# Altium PCB MainBoard1.PcbDoc
Units mil, origin at the board's own origin, x right, y up, seen from the top; angles counter-clockwise.
Board outline 6299.21 x 9187 mil, 4 copper layers (Component Side, Ground Plane, Power Plane, Solder Side), stack 33.234 mil thick; 71 components, 164 nets, 725 pads, 58 vias.
Unrouted connection lines stored in the file: 209.
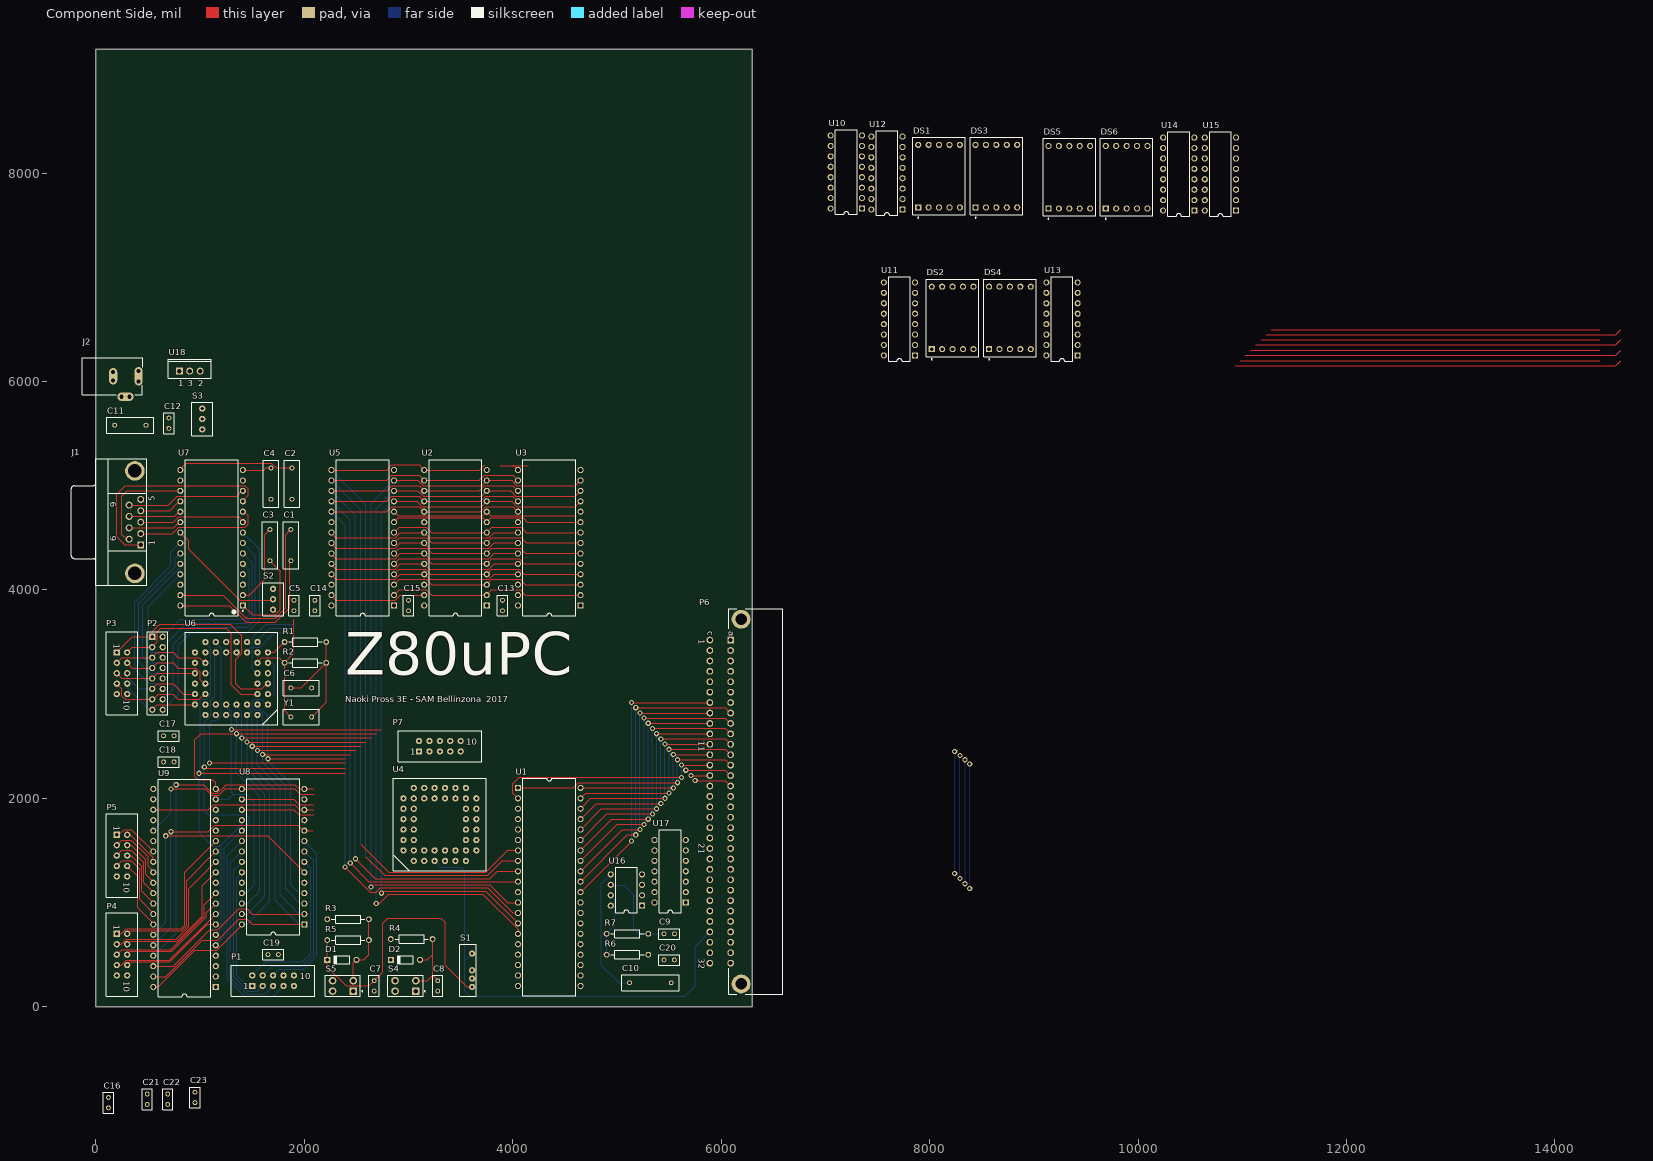
[diagram p0: Component Side view]
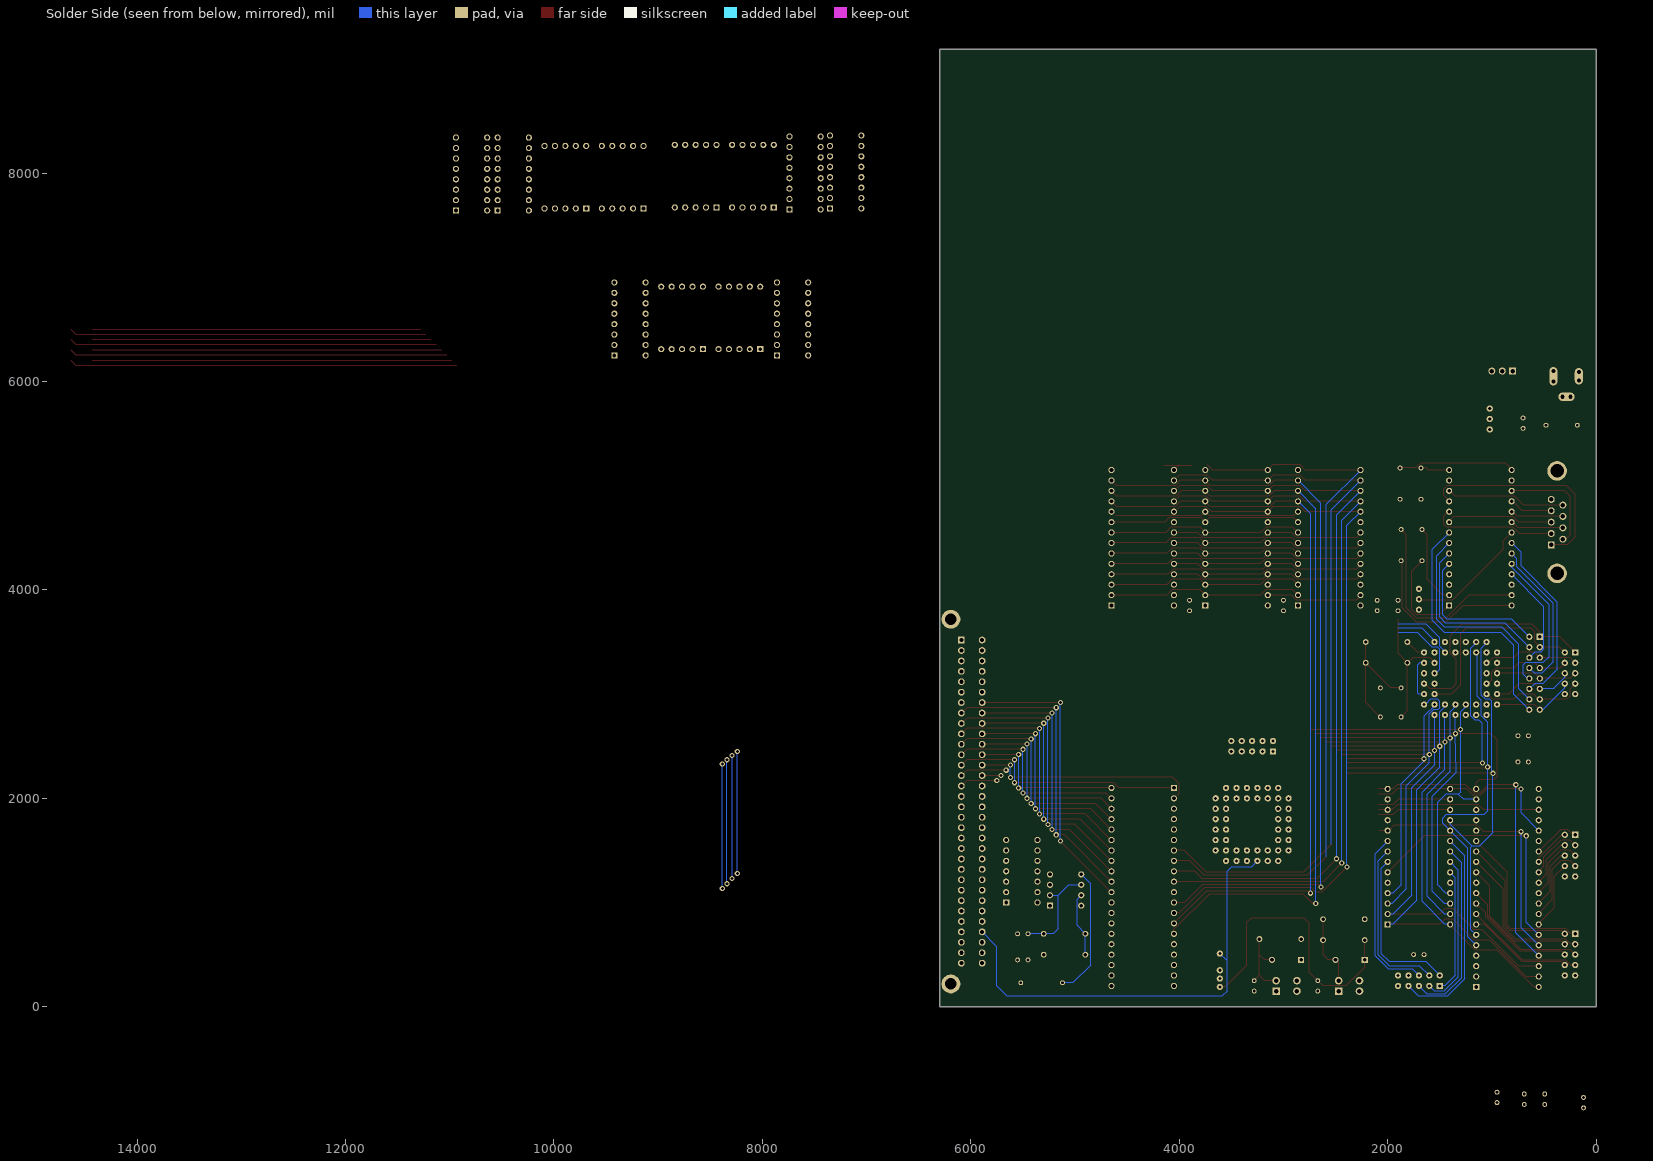
[diagram p1: Solder Side view, seen from below]
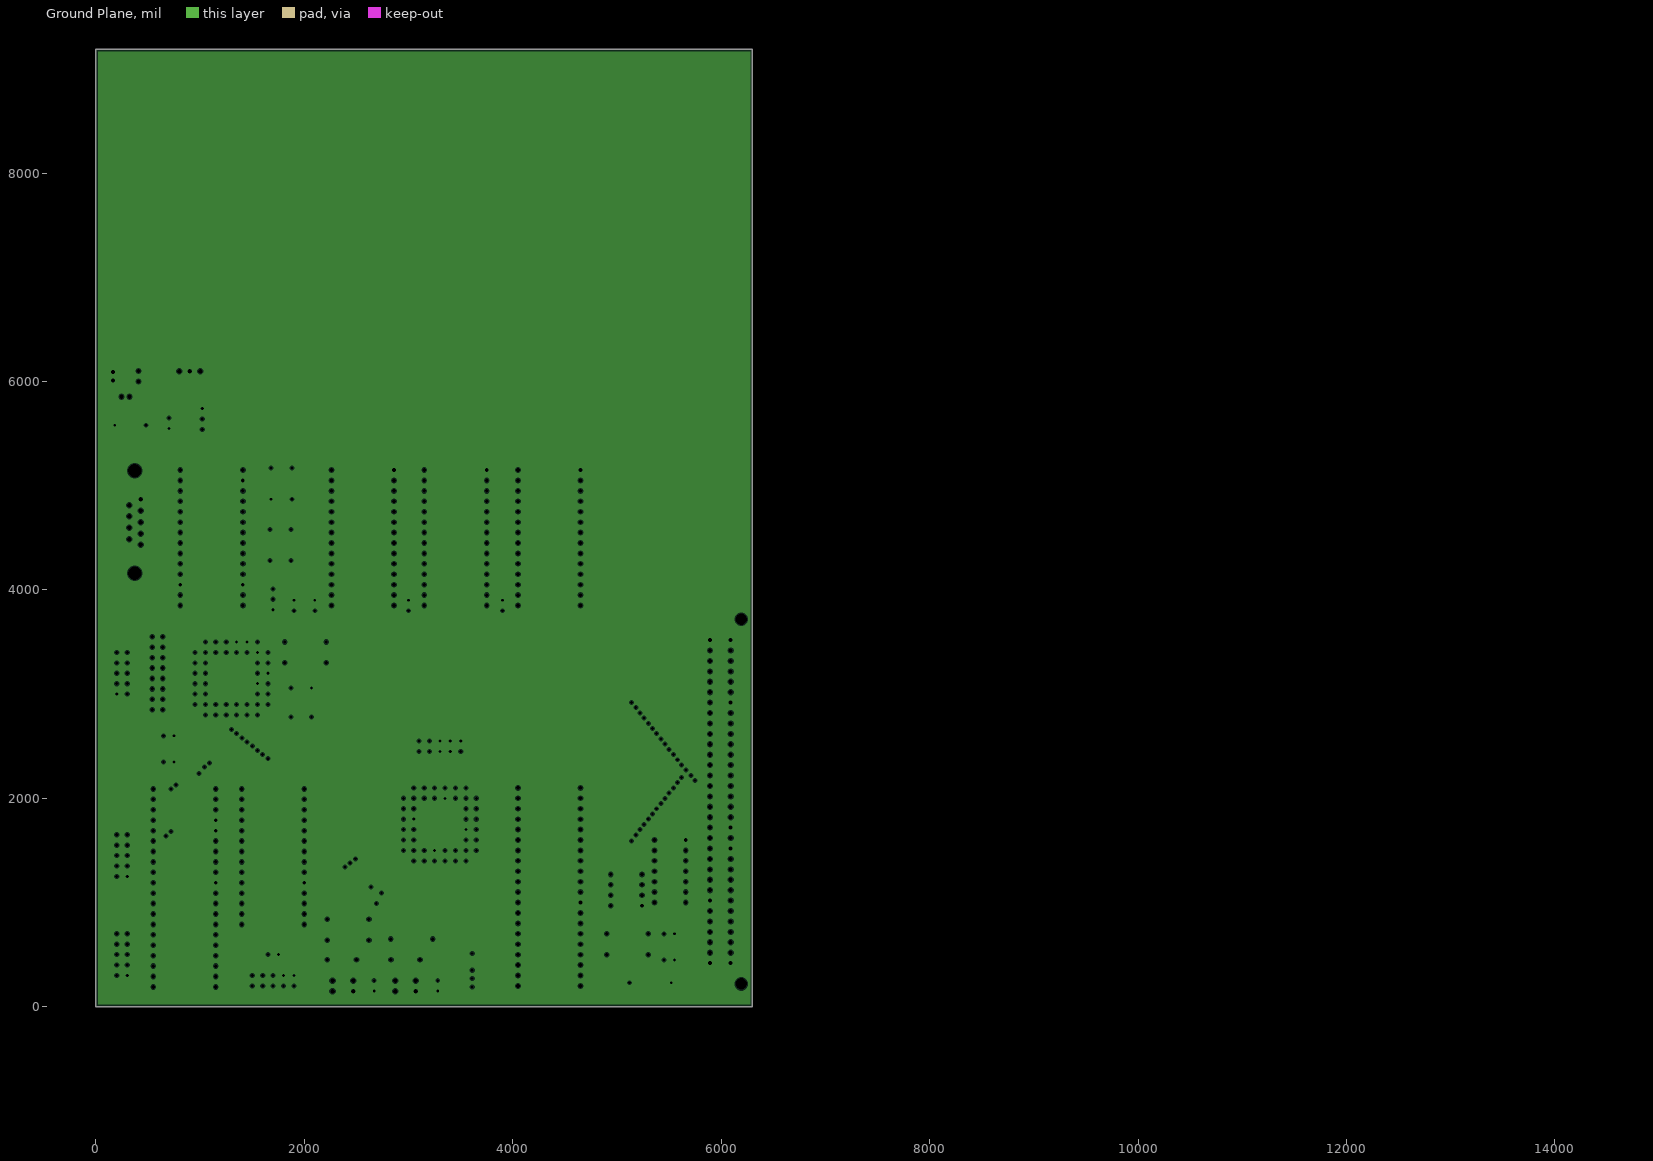
[diagram p2: Ground Plane, clearances drawn from the general rule]
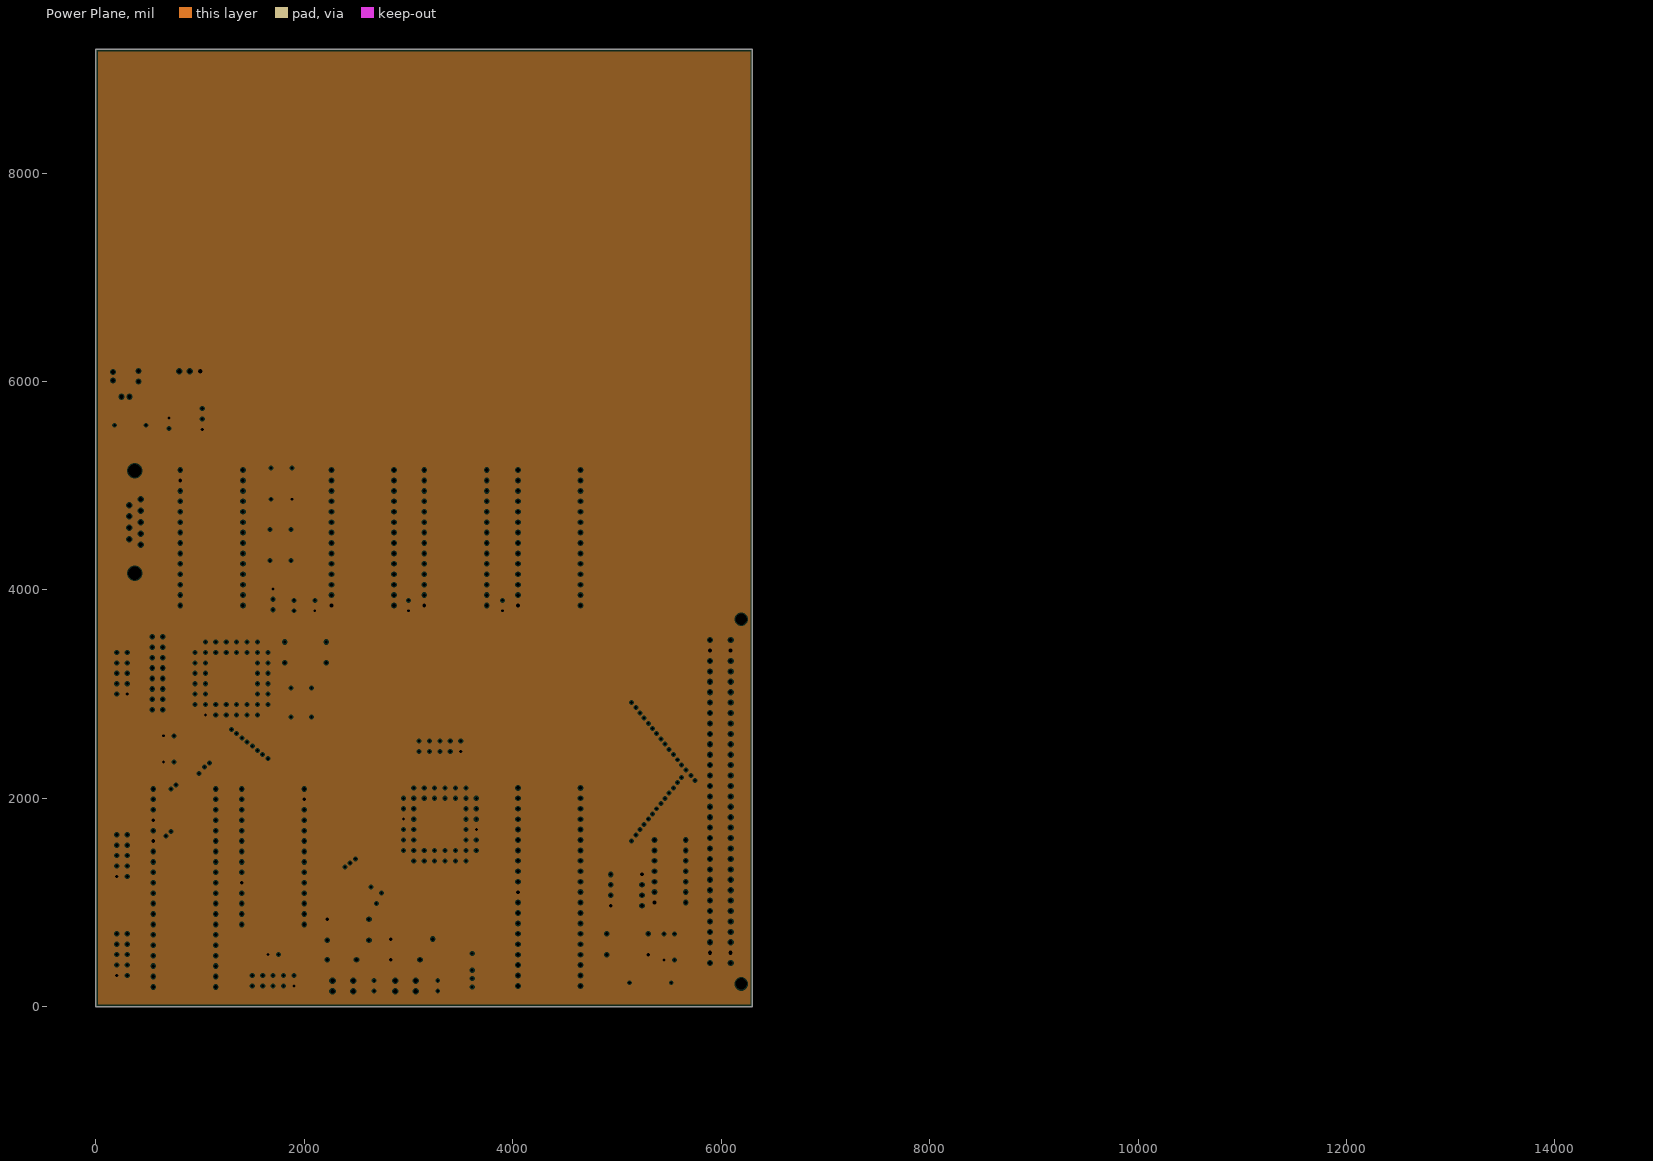
[diagram p3: Power Plane, clearances drawn from the general rule]

## Layer stack, top to bottom
Top Solder: solder mask 0.4, Solder Resist, Dk 3.5
Component Side: signal copper 1.4
Dielectric 1: core 12.6, FR-4, Dk 4.8
Ground Plane: plane copper 1.4169, net DB9-5
Dielectric 3: prepreg 5, Dk 4.2
Power Plane: plane copper 1.4169, net VCC
Dielectric 4: core 10, Dk 4.2
Solder Side: signal copper 1.4
Bottom Solder: solder mask 0.4, Solder Resist, Dk 3.5

## Board outline
0,0 0,9187 6299.21,9187 6299.21,0

## Design rules (kind name [scope] priority, off if disabled: settings)
BoardOutlineClearance [All] p1: gap=9.84 except(0: Arc-SplitContinuation Track-SplitContinuation SMDPad-SplitContinuation THPad-SplitContinuation Via-SplitContinuation Fill-SplitContinuation Poly-SplitContinuation Region-SplitContinuation Text-SplitContinuation)
Clearance Clearance-xPP-xTP-xTT [All] p1: gap=5.91
ComponentClearance [All] p1: gap=9.84 collisioncheckmode=3 verticalgap=9.84 showdistances=FALSE
DiffPairsRouting [All] p1: maxlimit=9.84 minlimit=9.84 mostfreqgap=9.84 toplayer_minwidth=15 toplayer_maxwidth=15 toplayer_prefwidth=15 bottomlayer_minwidth=15 bottomlayer_maxwidth=15 bottomlayer_prefwidth=15 maxuncoupledlength=492.13
Height [All] p1: minheight=0 maxheight=984.25 prefheight=492.13
HoleSize HoleSize-PTH [All] p1: absolutevalues=TRUE maxlimit=78.74 minlimit=9.84 maxpercent=80.000 minpercent=20.000
HoleToHoleClearance [All] p1: gap=13.78 allowstackedmicrovias=TRUE
MinimumAnnularRing "Minimum IAR  >0.45mm" [((ObjectKind = 'Pad') OR (ObjectKind = 'Via')) And (Layer = 'MultiLayer') And (HoleDiameter > AsMM(0.45))] p1: minimumring=6.89 // minimum inner annular ring for pads > 0.45mm finished hole size
MinimumAnnularRing "Minimum IAR <=0.45mm" [((ObjectKind = 'Pad') OR (ObjectKind = 'Via')) And (Layer = 'MultiLayer') And (HoleDiameter <= AsMM(0.45))] p2: minimumring=6.89 // minimum inner annular ring for pads <= 0.45mm finished hole size
MinimumSolderMaskSliver [All] p1: minsoldermaskwidth=3.15
PlaneClearance PlaneClearance-IPI [All] p1: clearance=9.84
PlaneConnect [All] p1: planeconnectstyle=Relief reliefexpansion=6.89 reliefentries=4 reliefconductorwidth=7.87 reliefairgap=7.87
PolygonConnect PolygonConnect-xTW [All] p1: connectstyle=Relief reliefconductorwidth=7.87 reliefentries=4 polygonreliefangle="90 Angle" airgapwidth=7.87
RoutingCorners [All] p1: cornerstyle=45-Degree minsetback=98.43 maxsetback=98.43
RoutingVias "RoutingVias > 0.45mm" [(ObjectKind = 'Via') And (HoleDiameter > AsMM(0.45))] p1: holewidth=19.68 width=33.46 viastyle="Through Hole" minholewidth=19.68 minwidth=33.46 maxholewidth=35.43 maxwidth=49.21 // finishet hole size > 0.45mm
RoutingVias "RoutingVias <= 0.45mm" [(ObjectKind = 'Via') And (HoleDiameter <= AsMM(0.45))] p2: holewidth=11.81 width=25.59 viastyle="Through Hole" minholewidth=9.84 minwidth=23.62 maxholewidth=17.72 maxwidth=31.5 // finishet hole size <= 0.45mm
SilkToSilkClearance [All] p1: silktosilkclearance=7.87
SilkToSolderMaskClearance SilkscreenOverComponentPads [IsPad] p1: minsilkscreentomaskgap=7.87 clearancetoexposedcopper=TRUE
SolderMaskExpansion [All] p1: expansion=0
Width Width-xTW [All] p1: maxlimit=60 minlimit=6 preferedwidth=10
19 further rules are at their usual default settings.

## Classes and differential pairs
component class BusViewer: DS1 DS2 DS3 DS4 DS5 DS6 S3 U10 U11 U12 U13 U14 U15
component class IODevices: C1 C2 C3 C4 C5 C6 J1 P1 P2 P3 P4 P5 R1 R2 S2 U6 U7 U8 U9 Y1
component class MainSheet: S1 U1 U2 U3 U4 U5
component class Peripherals: C7 C8 C9 C10 C11 C12 C13 C14 C15 C16 C17 C18 C19 C20 C21 C22 C23 D1 D2 J2 P6 P7 R3 R4 R5 R6 R7 S4 S5 U16 U18

## Components (designator, comment, footprint, x,y, rotation, side; value= is the part's Value field where it differs from the comment)
C1 "Cap" RAD-0.3 1870,4430 r90 top
C2 "Cap" RAD-0.3 1880,5020 r270 top
C3 "Cap" RAD-0.3 1670,4430 r270 top
C4 "Cap" RAD-0.3 1680,5020 r270 top
C5 "Cap" RAD-0.1 1900,3850 r90 top
C6 "Cap" RAD-0.2 1970,3060 r0 top
C7 "Cap" RAD-0.1 2670,200 r90 top
C8 "Cap" RAD-0.1 3280,200 r90 top
C9 "Cap" RAD-0.1 5500,700 r180 top
C10 "Cap" RAD-0.4 5320,230 r180 top
C11 "Cap" RAD-0.3 330,5580 r0 top
C12 "Cap" RAD-0.1 700,5600 r90 top
C13 "Cap" RAD-0.1 3900,3850 r270 top
C14 "Cap" RAD-0.1 2100,3850 r270 top
C15 "Cap" RAD-0.1 3000,3850 r270 top
C16 "Cap" RAD-0.1 120,-920 r270 top
C17 "Cap" RAD-0.1 700,2600 r180 top
C18 "Cap" RAD-0.1 700,2350 r180 top
C19 "Cap" RAD-0.1 1700,500 r180 top
C20 "Cap" RAD-0.1 5500,450 r180 top
C21 "Cap" RAD-0.1 492.13,-887.4 r90 top
C22 "Cap" RAD-0.1 688.98,-887.4 r90 top
C23 "Cap" RAD-0.1 950,-870 r90 top
D1 "1N4148" DO-35 2360,450 r180 top
D2 "1N4148" DO-35 2970,450 r180 top
DS1 "Dpy Blue-CC" H 8090,7970 r0 top
DS2 "Dpy Blue-CC" H 8220,6610 r0 top
DS3 "Dpy Blue-CC" H 8640,7970 r0 top
DS4 "Dpy Blue-CC" H 8770,6610 r0 top
DS5 "Dpy Blue-CC" H 9340,7960 r0 top
DS6 "Dpy Blue-CC" H 9890,7960 r0 top
J1 "D Connector 9" DSUB1.385-2H9 0,4650 r90 top
J2 "PWR2.5" KLD-0202 -130,6050 r0 top
P1 "MHDR1X10" HDR5x2_SOCK 1500,200 r0 top
P2 "Header 8X2" HDR2X8 540,3550 r270 top
P3 "Header 10" HDR5x2_SOCK 200,3400 r270 top
P4 "MHDR1X10" HDR5x2_SOCK 200,700 r270 top
P5 "MHDR1X10" HDR5x2_SOCK 200,1650 r270 top
P6 "Header 32X2" 0973264X804 6299.21,1968.5 r270 top locked
P7 "MHDR1X10" HDR5x2_SOCK 3100,2450 r0 top
R1 "Res2" AXIAL-0.4 2010,3500 r180 top
R2 "Res2" AXIAL-0.4 2010,3300 r180 top
R3 "Res2" AXIAL-0.4 2420,840 r180 top
R4 "Res2" AXIAL-0.4 3030,650 r180 top
R5 "Res2" AXIAL-0.4 2420,640 r180 top
R6 "Res2" AXIAL-0.4 5100,500 r0 top
R7 "Res2" AXIAL-0.4 5100,700 r180 top
S1 "SW-3WAY" SW_3WAY 3570,350 r270 top
S2 "SW-SPDT" SW_2WAY 1700,3910 r90 top
S3 "SW-SPDT" SW_2WAY 1020,5640 r270 top
S4 "SW-PB" DPST-4 2970,200 r180 top
S5 "SW-PB" DPST-4 2370,200 r180 top
U1 "Z84C0004PEC" PDIP40 4350,1150 r270 top
U2 "M28C64-150P1" PDIP28 3450,4500 r90 top
U3 "HM62256" PDIP28 4350,4500 r90 top
U4 "M4-32/32-15JC" PLCC44_SOCKET 3300,1750 r90 top
U5 "M28C64-150P1" PDIP28 2560,4500 r90 top
U6 "TL16C550C" PLCC44_SOCKET 1300,3150 r180 top
U7 "MAX214" DIP28W 1110,4500 r180 top
U8 "Z84C3004PEC" PDIP28 1700,1440 r90 top
U9 "Z84C2004PEC" PDIP40 850,1140 r90 top
U10 "MC14495" DIP16 7200,8010 r90 top
U11 "MC14495" DIP16 7710,6600 r90 top
U12 "MC14495" DIP16 7590,8000 r90 top
U13 "MC14495" DIP16 9270,6600 r90 top
U14 "MC14495" DIP16 10390,7990 r90 top
U15 "MC14495" DIP16 10790,7990 r90 top
U16 "SE555P" P008 5090,1120 r90 top
U17 "SG51P" DIP14 5510,1300 r90 top
U18 "L7805ACV" TO220ABN 900,6100 r0 top
Y1 "XTAL" RAD-0.2 1970,2780 r0 top

## Footprints (in the part's own frame and the unit in brackets; to place one, negate y for a bottom-side part, rotate by r counter-clockwise, add the part's x,y. Pads: shape width x height; smd on the part's side, far side on the other; paste and mask are expansions set on the pad)
0973264X804 [mm] "Connector; DIN 41612, Type R, Thru-Hole; Rows a+c, 64 Position; Right Angle"
  round 4.6 hole 2.8: 33(-44.45,-2.76) 34(44.45,-2.76)
  rect 1.65x1.65 hole 1: A1(-39.37,-5.3)
  round 1.65 hole 1: A2(-36.83,-5.3) A3(-34.29,-5.3) A4(-31.75,-5.3) A5(-29.21,-5.3) A6(-26.67,-5.3) A7(-24.13,-5.3) A8(-21.59,-5.3) A9(-19.05,-5.3) A10(-16.51,-5.3) A11(-13.97,-5.3) A12(-11.43,-5.3) A13(-8.89,-5.3) A14(-6.35,-5.3) A15(-3.81,-5.3) A16(-1.27,-5.3) A17(1.27,-5.3) A18(3.81,-5.3) A19(6.35,-5.3) A20(8.89,-5.3) A21(11.43,-5.3) A22(13.97,-5.3) A23(16.51,-5.3) A24(19.05,-5.3) A25(21.59,-5.3) A26(24.13,-5.3) A27(26.67,-5.3) A28(29.21,-5.3) A29(31.75,-5.3) A30(34.29,-5.3) A31(36.83,-5.3) A32(39.37,-5.3) C1(-39.37,-10.38) C2(-36.83,-10.38) C3(-34.29,-10.38) C4(-31.75,-10.38) C5(-29.21,-10.38) C6(-26.67,-10.38) C7(-24.13,-10.38) C8(-21.59,-10.38) C9(-19.05,-10.38) C10(-16.51,-10.38) C11(-13.97,-10.38) C12(-11.43,-10.38) C13(-8.89,-10.38) C14(-6.35,-10.38) C15(-3.81,-10.38) C16(-1.27,-10.38) C17(1.27,-10.38) C18(3.81,-10.38) C19(6.35,-10.38) C20(8.89,-10.38) C21(11.43,-10.38) C22(13.97,-10.38) C23(16.51,-10.38) C24(19.05,-10.38) C25(21.59,-10.38) C26(24.13,-10.38) C27(26.67,-10.38) C28(29.21,-10.38) C29(31.75,-10.38) C30(34.29,-10.38) C31(36.83,-10.38) C32(39.37,-10.38)
  silkscreen extent -47,-5.8 47,7.34
AXIAL-0.4 [mm] "Axial Device, Thru-Hole; 2 Leads; 0.4 in Pin Spacing"
  round 1.4 hole 0.85: 1(-5.08,0) 2(5.08,0)
  silkscreen extent -4.06,-1.02 4.06,1.02
DIP14 [mm] "DIP; 14 Leads; Row Spacing 7.62 mm; Pitch 2.54 mm"
  rect 1.5x1.5 hole 0.9: 1(-7.62,-3.81)
  round 1.5 hole 0.9: 2(-5.08,-3.81) 3(-2.54,-3.81) 4(0,-3.81) 5(2.54,-3.81) 6(5.08,-3.81) 7(7.62,-3.81) 8(7.62,3.81) 9(5.08,3.81) 10(2.54,3.81) 11(0,3.81) 12(-2.54,3.81) 13(-5.08,3.81) 14(-7.62,3.81)
  silkscreen extent -10.1,-2.65 10.1,2.65
DIP16 [mm] "DIP; 16 Leads; Row Spacing 7.62 mm; Pitch 2.54 mm"
  rect 1.5x1.5 hole 0.9: 1(-8.89,-3.81)
  round 1.5 hole 0.9: 2(-6.35,-3.81) 3(-3.81,-3.81) 4(-1.27,-3.81) 5(1.27,-3.81) 6(3.81,-3.81) 7(6.35,-3.81) 8(8.89,-3.81) 9(8.89,3.81) 10(6.35,3.81) 11(3.81,3.81) 12(1.27,3.81) 13(-1.27,3.81) 14(-3.81,3.81) 15(-6.35,3.81) 16(-8.89,3.81)
  silkscreen extent -10.3,-2.65 10.3,2.65
DIP28W [mm] "DIP, 28-Leads, Row Spacing 15.24mm, Pitch 2.54mm, Body 37.02x13.72mm"
  rect 1.5x1.5 hole 0.9: 1(-7.62,16.51)
  round 1.5 hole 0.9: 2(-7.62,13.97) 3(-7.62,11.43) 4(-7.62,8.89) 5(-7.62,6.35) 6(-7.62,3.81) 7(-7.62,1.27) 8(-7.62,-1.27) 9(-7.62,-3.81) 10(-7.62,-6.35) 11(-7.62,-8.89) 12(-7.62,-11.43) 13(-7.62,-13.97) 14(-7.62,-16.51) 15(7.62,-16.51) 16(7.62,-13.97) 17(7.62,-11.43) 18(7.62,-8.89) 19(7.62,-6.35) 20(7.62,-3.81) 21(7.62,-1.27) 22(7.62,1.27) 23(7.62,3.81) 24(7.62,6.35) 25(7.62,8.89) 26(7.62,11.43) 27(7.62,13.97) 28(7.62,16.51)
  silkscreen extent -7.75,-19.05 6.45,19.05, body extent -6.68,-19.05 6.68,19.05, height 4.92
DO-35 [mm] "Diode, Axial; Body 3.8 x 1.9 mm (LxDia. max), Lead Dia. 0.53 mm (max)"
  round 1.5 hole 0.9: 1(-3.55,0)
  rect 1.5x1.5 hole 0.9: 2(3.55,0)
  silkscreen extent -1.95,-0.95 2.05,0.95
DPST-4 [mm] "Switch; 4 Leads"
  rect 1.85x1.85 hole 1.1: 1(-2.54,1.27)
  round 1.85 hole 1.1: 2(-2.54,-1.27) 3(2.54,-1.27) 4(2.54,1.27)
  silkscreen extent -4.88,-2.54 4.28,2.54
DSUB1.385-2H9 [mm] "Connector; D Subminiature; 9 Position; Right Angle; Pitch 1.385 mm"
  rect 1.69x1.69 hole 1.09: 1(-5.54,-10.92)
  round 1.69 hole 1.09: 2(-2.77,-10.92) 3(0,-10.92) 4(2.77,-10.92) 5(5.54,-10.92) 6(-4.155,-8.08) 7(-1.385,-8.08) 8(1.385,-8.08) 9(4.155,-8.08)
  round 4.76 hole 3.26: 10(-12.495,-9.5) 11(12.495,-9.5)
  silkscreen extent -15.4,-12.4 15.4,6
H [mm] "LED, 7-Segment Display, 14.2 mm, RHD; 10 Leads; Row Space 15.24 mm; Pitch 2.54 mm"
  rect 1.5x1.5 hole 0.9: 1(-5.08,-7.62)
  round 1.5 hole 0.9: 2(-2.54,-7.62) 3(0,-7.62) 4(2.54,-7.62) 5(5.08,-7.62) 6(5.08,7.62) 7(2.54,7.62) 8(0,7.62) 9(-2.54,7.62) 10(-5.08,7.62)
  silkscreen extent -6.4,-10.22 6.4,9.45, body extent -6.4,-9.45 6.4,9.45, height 8.25
HDR2X8 [mm] "Connector; Header; 8x2 Position"
  rect 1.5x1.5 hole 0.9: 1(0,0)
  round 1.5 hole 0.9: 2(0,2.54) 3(2.54,0) 4(2.54,2.54) 5(5.08,0) 6(5.08,2.54) 7(7.62,0) 8(7.62,2.54) 9(10.16,0) 10(10.16,2.54) 11(12.7,0) 12(12.7,2.54) 13(15.24,0) 14(15.24,2.54) 15(17.78,0) 16(17.78,2.54)
  silkscreen extent -1.27,-1.27 19.05,3.81
HDR5x2_SOCK [mil]
  rect 60x60 hole 30: 1(0,0)
  round 60 hole 30: 2(0,100) 3(100,0) 4(100,100) 5(200,0) 6(200,100) 7(300,0) 8(300,100) 9(400,0) 10(400,100)
  silkscreen extent -200,-100 600,200
KLD-0202 [mm] "DC Power Jack, 2.5mm, KLD Series, PCB Mount"
  oval 2x4.5 all layers, no hole: 1(13.7,0)
  round 1.5 hole 1: 1A(13.7,-1.25) 1B(13.7,1.25) 2A(7.5,-1) 2B(7.5,1) 3A(9.5,-5) 3B(11.5,-5)
  oval 2x4 all layers, no hole: 2(7.5,0)
  oval 4x2 all layers, no hole: 3(10.5,-5)
  silkscreen extent 0,-4.5 14.6,4.5
P008 [mm] "DIP; 8 Leads; Row Spacing 7.62 mm; Pitch 2.54 mm"
  rect 1.5x1.5 hole 0.9: 1(-3.81,-3.81)
  round 1.5 hole 0.9: 2(-1.27,-3.81) 3(1.27,-3.81) 4(3.81,-3.81) 5(3.81,3.81) 6(1.27,3.81) 7(-1.27,3.81) 8(-3.81,3.81)
  silkscreen extent -5.5,-2.65 5.5,2.65
PDIP28 [mm] "DIP; 28 Leads; Row Spacing 15.24 mm; Pitch 2.54 mm"
  rect 1.5x1.5 hole 0.9: 1(-16.51,-7.62)
  round 1.5 hole 0.9: 2(-13.97,-7.62) 3(-11.43,-7.62) 4(-8.89,-7.62) 5(-6.35,-7.62) 6(-3.81,-7.62) 7(-1.27,-7.62) 8(1.27,-7.62) 9(3.81,-7.62) 10(6.35,-7.62) 11(8.89,-7.62) 12(11.43,-7.62) 13(13.97,-7.62) 14(16.51,-7.62) 15(16.51,7.62) 16(13.97,7.62) 17(11.43,7.62) 18(8.89,7.62) 19(6.35,7.62) 20(3.81,7.62) 21(1.27,7.62) 22(-1.27,7.62) 23(-3.81,7.62) 24(-6.35,7.62) 25(-8.89,7.62) 26(-11.43,7.62) 27(-13.97,7.62) 28(-16.51,7.62)
  silkscreen extent -19.05,-6.45 19.05,6.45
PDIP40 [mm] "DIP; 40 Leads; Row Spacing 15.24 mm; Pitch 2.54 mm"
  rect 1.5x1.5 hole 0.9: 1(-24.13,-7.62)
  round 1.5 hole 0.9: 2(-21.59,-7.62) 3(-19.05,-7.62) 4(-16.51,-7.62) 5(-13.97,-7.62) 6(-11.43,-7.62) 7(-8.89,-7.62) 8(-6.35,-7.62) 9(-3.81,-7.62) 10(-1.27,-7.62) 11(1.27,-7.62) 12(3.81,-7.62) 13(6.35,-7.62) 14(8.89,-7.62) 15(11.43,-7.62) 16(13.97,-7.62) 17(16.51,-7.62) 18(19.05,-7.62) 19(21.59,-7.62) 20(24.13,-7.62) 21(24.13,7.62) 22(21.59,7.62) 23(19.05,7.62) 24(16.51,7.62) 25(13.97,7.62) 26(11.43,7.62) 27(8.89,7.62) 28(6.35,7.62) 29(3.81,7.62) 30(1.27,7.62) 31(-1.27,7.62) 32(-3.81,7.62) 33(-6.35,7.62) 34(-8.89,7.62) 35(-11.43,7.62) 36(-13.97,7.62) 37(-16.51,7.62) 38(-19.05,7.62) 39(-21.59,7.62) 40(-24.13,7.62)
  silkscreen extent -26.5,-6.45 26.5,6.45
PLCC44_SOCKET [mil] "Socket for PLCC44"
  round 60 hole 30: 1(50,250) 2(-50,350) 3(-50,250) 4(-150,350) 5(-150,250) 6(-250,350) 7(-350,250) 8(-250,250) 9(-350,150) 10(-250,150) 11(-350,50) 12(-250,50) 13(-350,-50) 14(-250,-50) 15(-350,-150) 16(-250,-150) 17(-350,-250) 18(-250,-350) 19(-250,-250) 20(-150,-350) 21(-150,-250) 22(-50,-350) 23(-50,-250) 24(50,-350) 25(50,-250) 26(150,-350) 27(150,-250) 28(250,-350) 29(350,-250) 30(250,-250) 31(350,-150) 32(250,-150) 33(350,-50) 34(250,-50) 35(350,50) 36(250,50) 37(350,150) 38(250,150) 39(350,250) 40(250,350) 41(250,250) 42(150,350) 43(150,250) 44(50,350)
  silkscreen extent -445,-445 445,445
RAD-0.1 [mm] "Radial Cap, Thru-Hole; 2 Leads; 0.1 in Pin Spacing"
  round 1.2 hole 0.7: 1(-1.27,0) 2(1.27,0)
  silkscreen extent -2.54,-1.27 2.54,1.27
RAD-0.2 [mm] "Radial Cap, Thru-Hole; 2 Leads; 0.2 in Pin Spacing"
  round 1.2 hole 0.7: 1(-2.54,0) 2(2.54,0)
  silkscreen extent -4.44,-1.91 4.44,1.91
RAD-0.3 [mm] "Radial Cap, Thru-Hole; 2 Leads; 0.3 in Pin Spacing"
  round 1.2 hole 0.7: 1(-3.81,0) 2(3.81,0)
  silkscreen extent -5.71,-1.91 5.71,1.91
RAD-0.4 [mm] "Radial Cap, Thru-Hole; 2 Leads; 0.4 in Pin Spacing"
  round 1.2 hole 0.7: 1(-5.08,0) 2(5.08,0)
  silkscreen extent -6.98,-1.91 6.98,1.91
SW_2WAY [mil]
  round 60 hole 30: 1(-100,0) 2(0,0) 3(100,0)
  silkscreen extent -160,-100 160,100
SW_3WAY [mil]
  round 60 hole 30: 1(-160,40) 3(0,40) 4(80,40) 5(160,40)
  silkscreen extent -250,-80 250,80
TO220ABN [mm] "TO, Thru-Hole, Vertical, Heatsink Mounted; 3 In-Line Leads; Pitch 2.54 mm; Pin sequence 1, 3, 2"
  rect 1.7x1.7 hole 1.1: 1(-2.54,0)
  round 1.7 hole 1.1: 2(2.54,0) 3(0,0)
  silkscreen extent -5.2,-1.7 5.2,2.9

## Part data
C1 C2 C3 C4 C5 C6 C7 C8 C9 C10 C11 C12 C13 C14 C15 C16 C17 C18 C19 C20 C21 C22 C23: "Capacitor"
D1 D2: library part "Diode 1N4148", "High Conductance Fast Diode"
DS1 DS2 DS3 DS4 DS5 DS6: "14.2 mm General Purpose Blue 7-Segment Display: CC, RH DP, Gray Surface"
J1: "Receptacle Assembly, 9 Position, Right Angle"
J2: "Low Voltage Power Supply Connector"
P1 P3 P4 P5 P7: "Header, 10-Pin"
P2: "Header, 8-Pin, Dual row"
P6: "Header, 32-Pin, Dual row"
R1 R2 R3 R4 R5 R6 R7: "Resistor"
S1: "SGA-13P-03V-7295"
S2 S3: "SPDT Subminiature Toggle Switch, Right Angle Mounting, Vertical Actuation"
S4 S5: "Switch"
U1: "CMOS 8-Bit Microprocessor"
U2 U5: "Parallel 64 Kbit (8K x 8) EEPROM with Software Data Protection"
U3: "8K x 8 Static RAM"
U4: "High-Performance EE CMOS In-System Programmable Logic"
U8: "CMOS Four-Channel Counter/Timer Circuit"
U9: "CMOS Parallel I/O Controller"
U10 U11 U12 U13 U14 U15: "Hexadecimal to seven segment Latch / Decoder LED Driver"
U16: "Precision Timer"
U17: "4.000000  MHz High Frequency Oscillator"
U18: "Precision 1A Regulator"
Y1: "Crystal Oscillator"

## Via types
v1: diameter 50, hole 28, Component Side to Solder Side, 58 vias

## Nets (pads, with @x,y where several pads share a name; then routed paths per layer and width w, separated by ;. In a path a pad name is that pad's centre, name@x,y a point inside that pad or via, vN(x,y) a via of type N, cw(c..) or ccw(c..) an arc to the next point about the centre after c; other vN are vias at no path point)
A0: P6.C7 U1.30 U2.10 U3.10 U4.9 U5.10 U6.28 U8.18 U9.6 U10.5 | length 9360.3
  Component Side w10: v1(990,2240) 2390,2240 ; U5.10 2900.43,4709.57 3709.57,4709.57 U2.10 3790.43,4709.57 4609.57,4709.57 ; U1.30 v1(5140,1590) ; v1@5140,2918.5 P6.C7
  Solder Side w10: U6.28@1040,3500 1100,3440 1100,2990 1060,2950 1020,2950 1000,2930 1000,2270 v1(990,2240) 990,1670 1120,1540 1190,1540 ; U9.6 1200,740 1200,1530 1190,1540 ; U8.18 1400,1750 1190,1540 ; v1(5140,1590) v1(5140,2920)
A1: P6.A8 U1.31 U2.9 U3.9 U4.8 U5.9 U6.27 U8.19 U9.5 U10.6 | length 9452.4
  Component Side w10: v1(1040,2300) 1050,2290 2390,2290 ; U5.9 2900.43,4690.43 3709.57,4690.43 U2.9 3790.43,4690.43 4099.57,4690.43 4140,4650 U3.9 ; U1.31 5100,1650 v1(5180,1650) ; v1(5180,2870) 6039.06,2870 P6.A8
  Solder Side w10: U6.27@1140,3400 1140,2980 1100,2940 1100,2792.15 1040,2732.15 v1(1040,2300) 1040,1880 1080,1840 1440,1840 1470,1810 1470,1760 U8.19 1230,1520 1230,670 U9.5 ; v1(5180,1650) v1(5180,2870)
A2: P6.C8 U1.32 U2.8 U3.8 U4.7 U5.8 U6.26 U10.9 | length 6952.9
  Component Side w10: v1(1090,2340) 2390,2340 ; U5.8 2910,4600 3170,4600 3220,4550 U2.8 3800,4600 4080,4600 4130,4550 U3.8 ; U1.32 5050,1700 v1(5220,1700) ; v1@5220,2818.5 P6.C8
  Solder Side w10: v1(1090,2340) 1090,2720 1120,2750 1160,2750 1200,2790 1200,3440 U6.26@1140,3500 ; v1(5220,1700) v1(5220,2820)
A3: P6.A9 U1.33 U2.7 U3.7 U4.6 U5.7 U10.10 | length 4499.7
  Component Side w10: U5.7 2910,4500 3170,4500 3220,4450 U2.7 3800,4500 4080,4500 4130,4450 U3.7 ; U1.33 5000,1750 v1(5260,1750) ; v1(5260,2770) 6039.06,2770 P6.A9
  Solder Side w10: v1(5260,1750) v1(5260,2770)
A4: P6.C9 U1.34 U2.6 U3.6 U4.5 U5.6 U12.5 | length 4157.7
  Component Side w10: U5.6 2910,4400 3170,4400 3220,4350 U2.6 3800,4400 4070,4400 4120,4350 U3.6 ; U1.34 4950,1800 v1(5300,1800) ; v1@5300,2718.5 P6.C9
  Solder Side w10: v1(5300,1800) v1(5300,2720)
A5: P6.A10 U1.35 U2.5 U3.5 U4.4 U5.5 U12.6 | length 4258.3
  Component Side w10: U5.5 2910,4300 3170,4300 3220,4250 U2.5 3800,4300 4060,4300 4110,4250 U3.5 ; U1.35 4900,1850 v1(5340,1850) ; v1(5340,2670) 6039.06,2670 P6.A10
  Solder Side w10: v1(5340,1850) v1(5340,2670)
A6: P6.C10 U1.36 U2.4 U3.4 U4.3 U5.4 U12.9 | length 3916.2
  Component Side w10: U5.4 2910,4200 3160,4200 3210,4150 U2.4 3800,4200 4060,4200 4110,4150 U3.4 ; U1.36 4850,1900 v1(5380,1900) ; v1@5380,2618.5 P6.C10
  Solder Side w10: v1(5380,1900) v1(5380,2620)
A7: P6.A11 U1.37 U2.3 U3.3 U4.2 U5.3 U12.10 | length 4016.9
  Component Side w10: U5.3 2910,4100 3170,4100 3220,4050 U2.3 3800,4100 4070,4100 4120,4050 U3.3 ; U1.37 4800,1950 v1(5420,1950) ; v1(5420,2570) 6039.06,2570 P6.A11
  Solder Side w10: v1(5420,1950) v1(5420,2570)
A8: P6.C11 U1.38 U2.25 U3.25 U4.14 U5.25 U14.5 | length 3684.8
  Component Side w10: U5.25@2250,4150 2300,4100 2870,4100 2920,4150 U2.25 3200,4100 3770,4100 3820,4150 U3.25 ; U1.38 4750,2000 v1(5460,2000) ; v1@5460,2518.5 P6.C11
  Solder Side w10: v1(5460,2000) v1(5460,2520)
A9: P6.A12 U1.39 U2.24 U3.24 U4.15 U5.24 U14.6 | length 3785.4
  Component Side w10: U5.24@2250,4250 2300,4200 2870,4200 2920,4250 U2.24 3200,4200 3770,4200 3820,4250 U3.24 ; U1.39 4700,2050 v1(5500,2050) ; v1(5500,2470) 6039.06,2470 P6.A12
  Solder Side w10: v1(5500,2050) v1(5500,2470)
A10: P6.C12 U1.40 U2.21 U3.21 U4.16 U5.21 U14.9 | length 3443.4
  Component Side w10: U5.21@2250,4550 2300,4500 2870,4500 2920,4550 U2.21 3200,4500 3770,4500 3820,4550 U3.21 ; U1.40 v1(5540,2100) ; v1@5540,2418.5 P6.C12
  Solder Side w10: v1(5540,2100) v1(5540,2420)
A11: P6.A13 U1.1 U2.23 U3.23 U4.17 U5.23 U14.10 | length 4185.4
  Component Side w10: U5.23@2250,4350 2300,4300 2870,4300 2920,4350 U2.23 3200,4300 3770,4300 3820,4350 U3.23 ; U1.1 4580,2100 4630,2150 v1(5580,2150) ; v1(5580,2370) 6039.06,2370 P6.A13
  Solder Side w10: v1(5580,2150) v1(5580,2370)
A12: P6.C13 U1.2 U2.2 U3.2 U4.39 U5.2 U15.5 | length 4069
  Component Side w10: U5.2 2910,4000 3170,4000 3220,3950 U2.2 3800,4000 4070,4000 4120,3950 U3.2 ; U1.2 4000,2050 4000,2140 4060,2200 v1(5620,2200) ; v1@5620,2318.5 P6.C13
  Solder Side w10: v1(5620,2200) v1(5620,2320)
A13: P6.A14 U3.26 U4.38 U15.6 | length 451.9
  Component Side w10: v1(5660,2270) 6039.06,2270 P6.A14
A14: P6.C14 U3.1 U4.37 U15.9 | length 180.6
  Component Side w10: v1@5710,2218.5 P6.C14
  other v1: 5710,2220
A15: P6.A15 U4.36 U15.10 | length 361.9
  Component Side w10: v1(5750,2170) 6039.06,2170 P6.A15
B\U\S\A\C\K\: P6.C28 U1.23
B\U\S\R\E\Q\: P6.C27 U1.25
C\S\C\T\C\: U4.28 U8.16 | length 710.7
  Component Side w10: U8.16 1900,1990 1950,1940 2090,1940
C\S\P\I\O\: U4.29 U9.4
C\S\R\A\M\: U3.20 U4.26
C\S\R\O\M\H\: U4.25 U5.20
C\S\R\O\M\L\: U2.20 U4.24
C\S\U\A\R\T\: U4.27 U6.14 | length 712.8
  Solder Side w10: U6.14@1540,3200 1500,3240 1500,3430 1520,3450 1570,3450 1710,3590 1900,3590
C\T\S\: P2.7 P3.4 U6.36 | length 905.3
  Component Side w10: P3.4 350,3250 P2.7 590,3300 740,3300 790,3250 960,3250 1000,3210 1000,3140 U6.36@1040,3100
CLK: P6.C29 S1.1 U1.6 U4.11 U4.33 U8.15 U9.25 | length 6349.7
  Component Side w10: v1(720,2090) 1050,2090 1109.57,2030.43 1180.43,2030.43 1240,2090 U8.15 1910,2090 1960,2040 2090,2040
  Solder Side w10: U9.25@560,1690 U9.25 720,1860 v1(720,2090) ; U4.11 3310,1340 3500,1340 3540,1300 3540,440 ; S1.1 3540,440 ; P6.C29 5750,577.95 5750,200 5650,100 3590,100 3540,150 3540,440
CLK1: C7.2 D1.2 R5.2 S1.5 | length 2782.7
  Component Side w10: R5.2 2220.24,639.76 D1.2 2220.24,379.76 2400,200 2620,200 C7.2 2750,330 2750,800 2800,850 3310,850 3350,810 3350,400 3560,190 S1.5
CLK2: S1.4 U16.3
CLK3: S1.3 U17.8
D0: P6.C3 U1.14 U2.11 U3.11 U4.43 U5.11 U6.1 U8.25 U9.19 U11.5 | length 10819.4
  Component Side w10: v1(1300,2660) 2740,2660 ; v1(2740,1090) 2760,1110 3740,1110 U1.14 ; U5.11 3080,4850 3130,4800 3700,4800 U2.11 3990,4850 4040,4800 4600,4800 U3.11
  Solder Side w10: U9.19@1160,1990 1270,1990 1320,2040 ; U6.1@1240,2900 1240,2890 1300,2830 v1(1300,2660) 1300,2060 1320,2040 ; U8.25 1440,1090 1520,1170 1520,1960 1440,2040 1320,2040 ; v1(2740,1090) 2740,4730 U5.11
D1: P6.A3 U1.15 U2.12 U3.12 U4.42 U5.12 U6.2 U8.26 U9.20 U11.6 | length 11887.8
  Component Side w10: U9.20 1150,2150 1120,2180 980,2180 950,2210 950,2560 1010,2620 v1(1350,2620) 2690,2620 ; v1(2690,990) 2720,990 2810,1080 3712.82,1080 4050,742.82 U1.15 ; U5.12 3090,4950 3140,4900 3700,4900 U2.12 3980,4950 4030,4900 4600,4900 U3.12
  Solder Side w10: U6.2 v1(1350,2620) 1340,2247.87 1570,2017.87 1570,1110 1450,990 U8.26 ; v1(2690,990) 2690,4780 U5.12
D2: P6.C4 U1.12 U2.13 U3.13 U4.41 U5.13 U6.3 U8.27 U9.1 U11.9 | length 10839.1
  Component Side w10: v1(1400,2580) 2640,2580 ; v1(2640,1150) 2660,1170 3780,1170 3950,1000 U1.12 ; U5.13 3090,5050 3140,5000 3700,5000 U2.13 3990,5050 4040,5000 4600,5000 U3.13
  Solder Side w10: U6.3@1340,2900 1340,2890 1400,2830 1400,2258.58 1620,2038.58 1620,1060 1450,890 U8.27 ; v1(2640,1150) 2640,4830 U5.13
D3: P6.A4 U1.8 U2.15 U3.15 U4.40 U5.15 U6.4 U8.28 U9.40 U11.10 | length 11802.9
  Component Side w10: U9.40 600,190 950,540 1160,540 1400,780 U8.28 ; v1(1450,2540) 2590,2540 ; U5.15 2790,5150 2840,5200 3100,5200 U2.15 3680,5150 3730,5200 ; 2590,1440 2770,1260 3760,1260 3900,1400 U1.8 ; 3880,5190 4150,5190 ; 4000,5200 U3.15
  Solder Side w10: U8.28 1450,790 1670,1010 1670,2059.29 1450,2279.29 1450,2790 U6.4@1440,2800 ; U5.15 2590,4820 2590,1440
D4: P6.C5 U1.7 U2.16 U3.16 U5.16 U6.5 U8.1 U9.39 U13.5 | length 12297.4
  Component Side w10: U9.39 670,290 1020,640 1170,640 1370,840 1450,840 1500,790 U8.1 ; v1(1500,2500) 2540,2500 ; U5.16 2790,5050 2840,5100 3100,5100 U2.16 3680,5050 3730,5100 4000,5100 U3.16 ; 2540,1560 2810,1290 3740,1290 3950,1500 U1.7
  Solder Side w10: U6.5@1440,2900 1440,2890 1500,2830 1500,2300 1720,2080 1720,1020 1950,790 U8.1 ; U5.16 2540,4770 2540,1560
D5: P6.A5 U1.9 U2.17 U3.17 U5.17 U6.6 U8.2 U9.38 U13.6 | length 11934.2
  Component Side w10: U9.38 740,390 1090,740 1170,740 1370,940 1450,940 1500,890 U8.2 ; v1(1550,2460) 2490,2460 ; U5.17 2790,4950 2840,5000 3100,5000 U2.17 3680,4950 3730,5000 4000,5000 U3.17 ; v1(2490,1420) 2680,1230 3780,1230 3850,1300 U1.9
  Solder Side w10: U6.6@1540,2800 1550,2790 1550,2320.71 1770,2100.71 1770,1070 1950,890 U8.2 ; U5.17 2490,4720 v1(2490,1420)
D6: P6.C6 U1.10 U2.18 U3.18 U5.18 U6.7 U8.3 U9.3 U13.9 | length 10304.9
  Component Side w10: v1(1600,2420) 2440,2420 ; U5.18 2790,4850 2840,4900 3100,4900 U2.18 3690,4850 3740,4900 4000,4900 U3.18 ; v1(2440,1380) 2620,1200 U1.10
  Solder Side w10: U6.7@1640,2900 1590,2950 1520,2950 1500,2930 1500,2870 1520,2850 1560,2850 1600,2810 1600,2341.42 1820,2121.42 1820,1130 1960,990 U8.3 ; U5.18 2440,4670 v1(2440,1380)
D7: P6.A6 U1.13 U2.19 U3.19 U5.19 U6.8 U8.4 U9.2 U13.10 | length 9981.9
  Component Side w10: v1(1650,2380) 2390,2380 ; U5.19 2790,4750 2840,4800 3100,4800 U2.19 3690,4750 3740,4800 4000,4800 U3.19 ; v1(2390,1340) 2630,1100 2690,1100 2730,1140 3760,1140 4000,900 U1.13
  Solder Side w10: U6.8@1540,2900 1650,2790 1650,2362.13 1870,2142.13 1870,1170 1950,1090 U8.4 ; U5.19 2390,4620 v1(2390,1340)
D\C\D\: P2.13 P3.7 U6.38 | length 1005.3
  Component Side w10: P3.7 250,3050 250,2980 280,2950 P2.13 550,2950 600,3000 740,3000 790,2950 990,2950 U6.38@1040,3000
D\S\R\: P2.11 P3.6 U6.37 | length 797.7
  Component Side w10: P2.11 590,3100 740,3100 840,3000 U6.37@940,3000
  Solder Side w10: P3.6 300,3160 410,3050 ; 400,3050 P2.11
D\T\R\: P2.9 P3.5 U6.33 | length 781.4
  Component Side w10: P3.5 250,3150 P2.9 590,3200 U6.33@940,3200
DB9-1: J1.1 U7.11 | length 2108.5
  Component Side w10: J1.1 278.11,4431.89 200,4510 200,4920 280,5000 1430,5000 1460,4970 1460,4910 U7.11@1410,4860
DB9-2: J1.2 U7.10 | length 1217.7
  Component Side w10: J1.2 733.76,4540.94 793.25,4600.43 1430.43,4600.43 1460,4630 1460,4710 U7.10@1410,4760
DB9-3: J1.3 U7.9 | length 1017.7
  Component Side w10: J1.3 742.82,4650 793.25,4700.43 1369.57,4700.43 U7.9@1410,4660
DB9-4: J1.4 U7.18 | length 421.9
  Component Side w10: J1.4 709.05,4759.05 U7.18@810,4860
DB9-5: C4.2 C5.2 C6.2 C7.1 C8.1 C9.1 C10.1 C11.1 C12.1 C13.1 C14.1 C15.1 C16.1 C17.1 C18.1 C19.1 C20.1 C21.1 C22.1 C23.1 DS1.3 DS1.8 DS2.3 DS2.8 DS3.3 DS3.8 DS4.3 DS4.8 DS5.3 DS5.8 DS6.3 DS6.8 J1.5 J2.2 J2.2A J2.2B P1.8 P1.10 P3.9 P4.10 P5.10 P6.A1 P6.A7 P6.A19 P6.A21 P6.A32 P6.C1 P6.C26 P6.C32 P7.5 P7.6 P7.7 P7.8 P7.10 S2.1 S3.1 S4.1 S5.1 U1.29 U2.14 U3.14 U4.1 U4.12 U4.23 U4.34 U5.14 U6.12 U6.13 U6.19 U6.20 U6.22 U7.3 U7.13 U7.26 U8.5 U9.11 U9.16 U9.17 U10.8 U11.8 U12.8 U13.8 U14.8 U15.8 U16.1 U17.7 U18.3
DB9-6: J1.6 U7.17 | length 1041
  Component Side w10: J1.6 293.58,4486.42 250,4530 250,4900 300,4950 800,4950 U7.17@810,4960
DB9-7: J1.7 U7.20 | length 518.6
  Component Side w10: J1.7 745.47,4595.47 U7.20@810,4660
DB9-8: J1.8 U7.19 | length 514.9
  Component Side w10: J1.8 754.53,4704.53 U7.19@810,4760
DB9-9: J1.9 U7.12 | length 1152.5
  Component Side w10: J1.9 693.58,4813.58 780,4900 1350,4900 U7.12@1410,4960
H\A\L\T\: P6.C24 U1.18
I\N\T\: P6.C22 U1.16 U8.12 U9.23 | length 1581.4
  Component Side w10: U9.23 1080,1890 1130,1940 1910,1940 1960,1890 U8.12 2090,1890
I\O\R\Q\: P6.A24 U1.20 U8.10 U9.36 | length 2566
  Component Side w10: v1(720,1680) 1080,1680 1140,1740 1940,1740 1990,1690 U8.10 2080,1690
  Solder Side w10: U9.36 720,760 v1(720,1680)
LE: S3.2 U10.7 U11.7 U12.7 U13.7 U14.7 U15.7
M\1\: P6.A20 U1.27 U8.14 U9.37 | length 3137.4
  Component Side w10: v1(770,2130) 1032.49,2130 1116.16,2046.34 1166.34,2046.34 1250.43,2130.43 1909.57,2130.43 1950,2090 U8.14 2090,2090
  Solder Side w10: U9.37 770,710 770,2080 v1(770,2130)
M\R\E\Q\: P6.C23 U1.19
MMU_A12: U4.18
MMU_A13: U1.3 U4.19
MMU_A14: U1.4 U4.20
MMU_A15: U1.5 U4.21
NetC1_1: C1.1 U7.28 | length 1632.5
  Component Side w10: U7.28@810,3860 820,3850 1280,3850 1440,3690 1720,3690 1860,3830 1860,4270 C1.1
NetC1_2: C1.2 U7.27 | length 1917.4
  Component Side w10: U7.27@810,3960 820,3950 1220,3950 1440,3730 1720,3730 1820,3830 1820,4530 C1.2
NetC2_1: C2.1 U7.15 | length 1115.2
  Component Side w10: U7.15@810,5160 864.53,5214.53 1684.3,5214.53 1728.83,5170 1870,5170 C2.1@1880,5180
NetC3_1: C3.1 U7.2 | length 777
  Component Side w10: U7.2@1410,3960 1420,3950 1470,3950 1620,4100 1620,4530 C3.1
NetC3_2: C3.2 U7.1 | length 937
  Component Side w10: U7.1@1410,3860 1410,3854.09 1504.09,3760 1720,3760 1770,3810 1770,4180 C3.2
NetC4_1: C4.1 U7.14 | length 288.3
  Component Side w10: U7.14@1400,5150 U7.14 1610,5150 1630,5170 C4.1
NetC5_1: C5.1 R2.2 U6.16 Y1.1 | length 1313.6
  Component Side w10: U6.16@1540,3300 1590,3350 1760,3350 R2.2 ; Y1.1 1810,2840 R2.2 ; 1900,3720 1900,3390 R2.2
NetC6_1: C6.1 R1.1 R2.1 Y1.2 | length 1217.4
  Component Side w10: C6.1 1970,3060 R2.1 ; Y1.2 2210,2920 R2.1 ; R1.1 R2.1
NetC9_2: C9.2 R7.1 U16.2 U16.6 | length 972.1
  Solder Side w7.87: R7.1 C9.2
  Solder Side w10: U16.6@4935.83,1166.93 5063.07,1166.93 5160,1070 ; U16.2@5235.83,1066.93 5163.07,1066.93 5160,1070 ; R7.1 5210,700 5160,750 5160,1070
NetC10_2: C10.2 U16.5 | length 1247.7
  Solder Side w10: U16.5 4850,1180 4850,400 5020,230 C10.2
NetC11_2: C11.2 J2.1 J2.1A J2.1B U18.1
NetD1_1: D1.1 R3.1 R5.1 S5.2 | length 693.3
  Component Side w10: S5.2 2470,420.24 D1.1 2570,450 2620,500 R5.1 R3.1
NetDS1_1: DS1.1 U10.1
NetDS1_2: DS1.2 U10.15
NetDS1_4: DS1.4 U10.14
NetDS1_6: DS1.6 U10.13
NetDS1_7: DS1.7 U10.12
NetDS1_9: DS1.9 U10.2
NetDS1_10: DS1.10 U10.3
NetDS2_1: DS2.1 U11.1
NetDS2_2: DS2.2 U11.15
NetDS2_4: DS2.4 U11.14
NetDS2_6: DS2.6 U11.13
NetDS2_7: DS2.7 U11.12
NetDS2_9: DS2.9 U11.2
NetDS2_10: DS2.10 U11.3
NetDS3_1: DS3.1 U12.1
NetDS3_2: DS3.2 U12.15
NetDS3_4: DS3.4 U12.14
NetDS3_6: DS3.6 U12.13
NetDS3_7: DS3.7 U12.12
NetDS3_9: DS3.9 U12.2
NetDS3_10: DS3.10 U12.3
NetDS4_1: DS4.1 U13.1
NetDS4_2: DS4.2 U13.15
NetDS4_4: DS4.4 U13.14
NetDS4_6: DS4.6 U13.13
NetDS4_7: DS4.7 U13.12
NetDS4_9: DS4.9 U13.2
NetDS4_10: DS4.10 U13.3
NetDS5_1: DS5.1 U14.1
NetDS5_2: DS5.2 U14.15
NetDS5_4: DS5.4 U14.14
NetDS5_6: DS5.6 U14.13
NetDS5_7: DS5.7 U14.12
NetDS5_9: DS5.9 U14.2
NetDS5_10: DS5.10 U14.3
NetDS6_1: DS6.1 U15.1
NetDS6_2: DS6.2 U15.15
NetDS6_4: DS6.4 U15.14
NetDS6_6: DS6.6 U15.13
NetDS6_7: DS6.7 U15.12
NetDS6_9: DS6.9 U15.2
NetDS6_10: DS6.10 U15.3
NetJ2_3: J2.3 J2.3A J2.3B
NetP1_1: P1.1 U8.23 | length 1202.1
  Solder Side w10: U8.23 1350,1240 1350,300 1450,200 P1.1
NetP1_2: P1.2 U8.7 | length 1551.8
  Solder Side w10: P1.2 1630,430 1980,430 2060,510 2060,1330 U8.7
NetP1_3: P1.3 U8.22 | length 1491.8
  Solder Side w10: U8.22 1320,1310 1320,290 1460,150 1550,150 P1.3
NetP1_4: P1.4 U8.8 | length 1600.1
  Solder Side w10: P1.4 1690,390 1980,390 2090,500 2090,1400 U8.8
NetP1_5: P1.5 U8.21 | length 1765
  Solder Side w10: U8.21 1290,1380 1290,280 1450,120 1620,120 P1.5
NetP1_6: P1.6 U8.9 | length 1648.4
  Solder Side w10: P1.6 1760,360 1990,360 2120,490 2120,1470 U8.9
NetP1_7: P1.7 U8.20 | length 2029.8
  Solder Side w10: U8.20 1260,1450 1260,270 1430,100 1700,100 P1.7
NetP2_2: P2.2 U7.5 | length 1441.8
  Solder Side w10: P2.2 810,3720 1430,3720 1470,3760 1470,4190 U7.5 U7.5@1410,4260
NetP2_4: P2.4 U7.6 | length 1637.4
  Solder Side w10: P2.4 870,3680 1440,3680 1500,3740 1500,4260 U7.6 U7.6@1410,4360
NetP2_6: P2.6 U7.25 | length 1030.3
  Solder Side w10: P2.6 590,3400 532.82,3400 499.57,3433.25 499.57,3839.57 U7.25 U7.25@810,4160
NetP2_8: P2.8 U7.23 | length 1512
  Solder Side w10: P2.8 590,3200 520,3200 410,3310 410,3870 760,4220 760,4300 U7.23 U7.23@810,4360
NetP2_10: P2.10 U7.24 | length 1498.8
  Solder Side w10: P2.10 660,3150 700,3190 700,3280 680,3300 510,3300 450,3360 450,3857.18 810,4217.18 U7.24@810,4260
NetP2_12: P2.12 U7.22 | length 1751
  Solder Side w10: P2.12 590,3100 510,3100 370,3240 370,3880 720,4230 720,4360 U7.22 U7.22@810,4460
NetP2_14: P2.14 U7.7 | length 2250.5
  Solder Side w10: P2.14 740,3050 740,3480 900,3640 1450,3640 1530,3720 1530,4330 U7.7 U7.7@1410,4460
NetP2_16: P2.16 U7.8 | length 2477.8
  Solder Side w10: P2.16 790,3000 790,3470 910,3590 1450,3590 1570,3710 1570,4390 U7.8 U7.8@1410,4560
NetP4_1: P4.1 U9.15 | length 1617.4
  Component Side w10: P4.1 242.15,700 288.49,746.34 816.34,746.34 850,780 850,1290 U9.15
NetP4_2: P4.2 U9.14 | length 1430.6
  Component Side w10: P4.2 330.43,730.43 822.93,730.43 870,777.51 870,1210 U9.14
NetP4_3: P4.3 U9.13 | length 1488.1
  Component Side w10: P4.3 242.15,600 291.72,649.57 769.57,649.57 890,770 890,1130 U9.13
NetP4_4: P4.4 U9.12 | length 1305.7
  Component Side w10: P4.4 330.43,630.43 780.43,630.43 1020,870 1020,1160 U9.12
NetP4_5: P4.5 U9.10 | length 1293.1
  Component Side w10: P4.5 246.34,546.34 718.83,546.34 1040,867.51 1040,980 U9.10 ; U9.10@1127.18,1090 U9.10 ; U9.10@1160,1090 U9.10
NetP4_6: P4.6 U9.9 | length 1073.5
  Component Side w10: P4.6 330.43,530.43 725.42,530.43 1060,865.01 1060,900 U9.9
NetP4_7: P4.7 U9.8 | length 1153
  Component Side w10: P4.7 242.15,400 288.49,446.34 703.84,446.34 1147.51,890 U9.8
NetP4_8: P4.8 U9.7 | length 1011.5
  Component Side w10: P4.8 330.43,430.43 710.43,430.43 1070,790 U9.7
NetP5_1: P5.1 U9.27 | length 457.7
  Component Side w10: P5.1 220,1650 270,1700 340,1700 U9.27
NetP5_2: P5.2 U9.28 | length 381.1
  Component Side w10: P5.2 330,1650 550,1430 U9.28
NetP5_3: P5.3 U9.29 | length 561.8
  Component Side w10: P5.3 250,1600 340,1600 500,1440 500,1350 U9.29@560,1290
NetP5_4: P5.4 U9.30 | length 491.1
  Component Side w10: P5.4 340,1550 480,1410 480,1270 U9.30@560,1190
NetP5_5: P5.5 U9.31 | length 661.8
  Component Side w10: P5.5 250,1500 340,1500 460,1380 460,1190 U9.31@560,1090
NetP5_6: P5.6 U9.32 | length 591.1
  Component Side w10: P5.6 340,1450 440,1350 440,1110 U9.32@560,990
NetP5_7: P5.7 U9.33 | length 761.8
  Component Side w10: P5.7 250,1400 340,1400 420,1320 420,1030 U9.33@560,890
NetP5_8: P5.8 U9.34 | length 667.7
  Component Side w10: P5.8 400,1250 400,950 U9.34@560,790
NetR1_2: R1.2 U6.17 | length 211.4
  Component Side w10: U6.17@1640,3400 1710,3400 R1.2
NetR6_1: R6.1 R7.2 U16.7 | length 621.2
  Component Side w10: R7.2@4896.46,703.54 R7.2
  Solder Side w7.87: R7.2 4980,780 4980,1030 U16.7
  Solder Side w10: R6.1 R7.2@4900,696.46
NetS2_2: S2.2 U7.21 | length 1220.2
  Component Side w10: U7.21@810,4560 U7.21 890,4470 890,4390 1380,3900 1690,3900 S2.2
NetU6_9: U6.9 U6.15 | length 422.4
  Solder Side w10: U6.9@1640,3000 1700,3000 1710,3010 1710,3280 1690,3300 U6.15@1640,3300
NMI: P6.A23 U1.17
R\D\: P6.C17 U1.21 U2.22 U3.22 U5.22 U6.21 U8.6 U9.35 | length 4976.2
  Component Side w10: v1(670,1640) 1650,1640 U8.6 ; U5.22@2250,4450 2300,4400 2870,4400 2920,4450 U2.22 3200,4400 3770,4400 3820,4450 U3.22
  Solder Side w10: U9.35 670,810 v1(670,1640) ; U6.21@1440,3400 1499.09,3459.09 1499.09,3539.09 1630,3670 1900,3670
R\F\S\H\: P6.C25 U1.28
R\I\: P2.15 P3.8 U6.39 | length 797.7
  Component Side w10: P2.15 590,2900 U6.39
  Solder Side w10: P3.8 300,3060 510,2850 P2.15
R\S\T\: C8.2 D2.1 P6.A22 R4.1 S4.2 U1.26 U8.17 | length 1453.1
  Component Side w10: U8.17 1900,1890 1950,1840 2090,1840 ; S4.2 3180,250 3230,300 ; D2.1 3180,450 3230,500 ; R4.1 3230,500 ; C8.2 3230,300 ; 3230,300 3230,500
R\T\S\: P2.5 P3.3 U6.32 | length 922.8
  Component Side w10: P3.3 250,3350 P2.5 590,3400 740,3400 790,3350 990,3350 U6.32@1040,3300
RXD: P2.3 P3.2 U6.10 | length 1941.8
  Component Side w10: P3.2 350,3450 P2.3 590,3500 590,3600 620,3630 1250,3630 1300,3580 1300,3090 1390,3000 U6.10@1540,3000
TCK: P7.2 U4.13
TDI: P7.1 U4.10
TDO: P7.4 U4.35
TMS: P7.3 U4.32
TXD: P2.1 P3.1 U6.11 | length 2213
  Component Side w10: P3.1 350,3550 P2.1 540,3600 610,3670 1290,3670 1400,3560 1400,3392.15 1340,3332.15 1340,3100 1390,3050 1590,3050 U6.11@1640,3100
VCC: C2.2 C12.2 C13.2 C14.2 C15.2 C16.2 C17.2 C18.2 C19.2 C20.2 C21.2 C22.2 C23.2 D2.2 P1.9 P3.10 P4.9 P5.9 P6.A2 P6.A31 P6.C2 P6.C31 P7.9 R3.2 R4.2 R6.2 S2.3 S3.3 U1.11 U2.28 U3.28 U4.22 U4.44 U5.28 U6.40 U7.16 U8.13 U8.24 U9.24 U9.26 U10.16 U11.16 U12.16 U13.16 U14.16 U15.16 U16.4 U16.8 U17.14 U18.2
W\A\I\T\: P6.A25 U1.24
W\R\: P6.A18 U1.22 U2.27 U5.27 U6.18 | length 1355.3
  Component Side w10: U5.27@2250,3950 2300,3900 2870,3900 2920,3950 U2.27
  Solder Side w10: U6.18@1540,3500 1670,3630 1900,3630
pads on no net: DS1.5 DS2.5 DS3.5 DS4.5 DS5.5 DS6.5 J1.10 J1.11 P6.33 P6.34 P6.A16 P6.A17 P6.A26 P6.A27 P6.A28 P6.A29 P6.A30 P6.C15 P6.C16 P6.C18 P6.C19 P6.C20 P6.C21 P6.C30 S4.3 S4.4 S5.3 S5.4 U2.1 U2.26 U3.27 U4.30 U4.31 U5.1 U5.26 U6.23 U6.24 U6.25 U6.29 U6.30 U6.31 U6.34 U6.35 U6.41 U6.42 U6.43 U6.44 U7.4 U8.11 U9.18 U9.21 U9.22 U10.4 U10.11 U11.4 U11.11 U12.4 U12.11 U13.4 U13.11 U14.4 U14.11 U15.4 U15.11 U17.1 U17.2 U17.3 U17.4 U17.5 U17.6 U17.9 U17.10 U17.11 U17.12 U17.13
copper on no net: | length 32221
  Component Side w10: 10930,6150 14582.05,6150 14630.55,6198.5 ; 10980,6198.5 14430.55,6198.5 ; 11030,6250 14582.05,6250 14630.55,6298.5 ; 11080,6298.5 14430.55,6298.5 ; 11130,6350 14582.05,6350 14630.55,6398.5 ; 11180,6398.5 14430.55,6398.5 ; 11230,6450 14582.05,6450 14630.55,6498.5 ; 11280,6498.5 14430.55,6498.5
  Solder Side w10: v1(8240,1280) v1(8240,2450) ; v1(8290,1230) v1(8290,2410) ; v1(8340,1180) v1(8340,2370) ; v1(8383.73,1133.73) v1(8383.73,2330)

## Polygon pours and split planes (outlines as drawn)
DB9-5 on Ground Plane (split plane): 6279.12,20.1 20.1,20.1 20.1,9166.9 6279.12,9166.9
VCC on Power Plane (split plane): 6279.12,20.1 20.1,20.1 20.1,9166.9 6279.12,9166.9

## Silkscreen, mask and mechanical layers (free items; w line width, h text height)
Top Overlay:
  text "Z80uPC" at 2390,3050 h700
  text "Naoki Pross 3E - SAM Bellinzona  2017" at 2390,2920 h60

## Dimensions
0,9187 to 0,0 on Mechanical 1
0,0 to 6299.21,0 on Mechanical 1

## Text inside footprints (layer, text, board x,y; h text height)
J1: Top Overlay "1" at 565.94,4422.05 h59.06 r90; Top Overlay "5" at 565.94,4848.43 h59.06 r90; Top Overlay "9" at 195.87,4793.9 h59.06 r90; Top Overlay "6" at 195.87,4466.73 h59.06 r90
J2: Mechanical 1 "Alert PCB fab to slot details" at -118.74,6288.81 h11.81; Mechanical 1 "Assign keep-out area to slot" at -118.74,6308.5 h11.81; Mechanical 1 "Mech 1 - Slot cut-out" at -118.74,6269.13 h11.81; Mechanical 1 "Mech 2 - Clearance, move to internal plane if present" at -118.74,6249.44 h11.81
P1: Top Overlay "1" at 1415,170 h60; Top Overlay "10" at 1955,265 h60
P3: Top Overlay "10" at 265,2945 h60 r270; Top Overlay "1" at 170,3485 h60 r270
P4: Top Overlay "1" at 170,785 h60 r270; Top Overlay "10" at 265,245 h60 r270
P5: Top Overlay "1" at 170,1735 h60 r270; Top Overlay "10" at 265,1195 h60 r270
P6: Mechanical 1 "PCB Edge" at 6318.9,3798.03 h23.62 r270; Top Overlay "1" at 5784.25,3528.35 h59.06 r270; Top Overlay "a" at 6070.87,3605.51 h59.06 r270; Top Overlay "c" at 5870.87,3605.51 h59.06 r270; Top Overlay "32" at 5784.25,467.72 h59.06 r270; Top Overlay "11" at 5784.25,2552.95 h59.06 r270; Top Overlay "21" at 5784.25,1567.72 h59.06 r270
P7: Top Overlay "1" at 3015,2420 h60; Top Overlay "10" at 3555,2515 h60
U18: Top Overlay "3" at 880.31,5955.31 h59.06; Top Overlay "2" at 980.32,5955.31 h59.06; Top Overlay "1" at 790.16,5955.31 h59.06